# Altium PCB PCB1.PcbDoc
Units mil, origin at the board's own origin, x right, y up, seen from the top; angles counter-clockwise.
Board outline 910 x 1295 mil, 2 copper layers (Top Layer, Bottom Layer); 2 components, 0 nets, 64 pads, 52 vias.
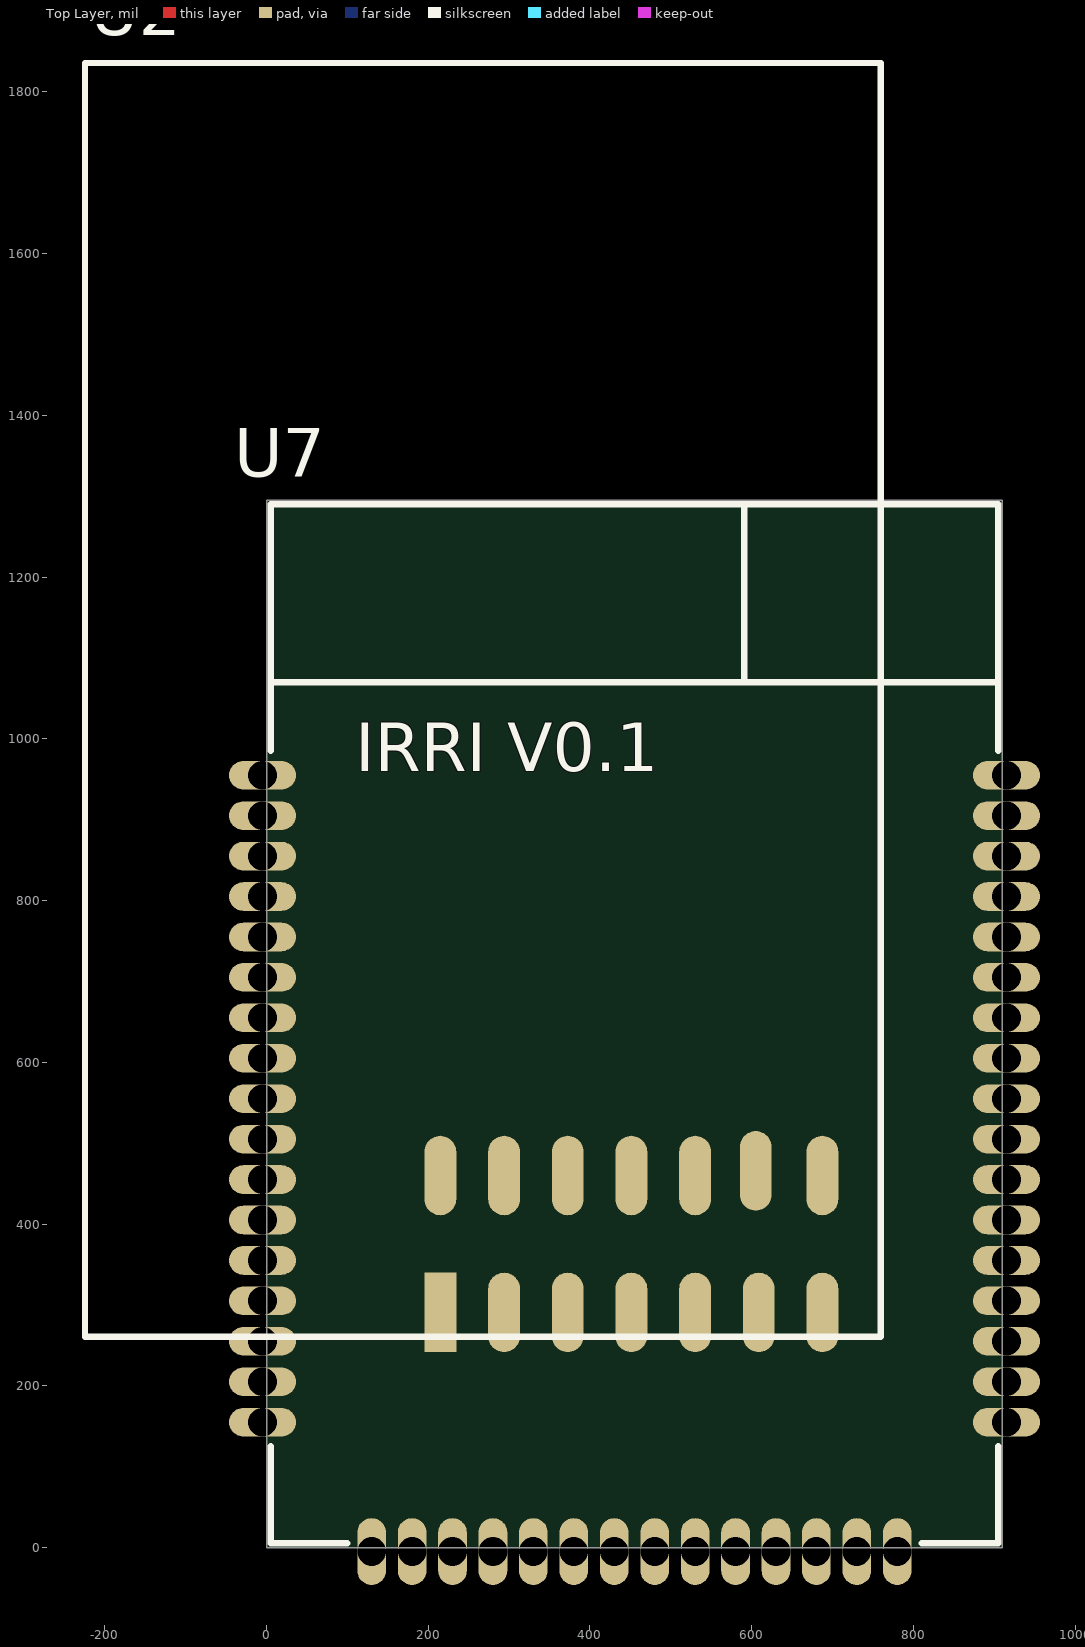
[diagram p0: Top Layer view]
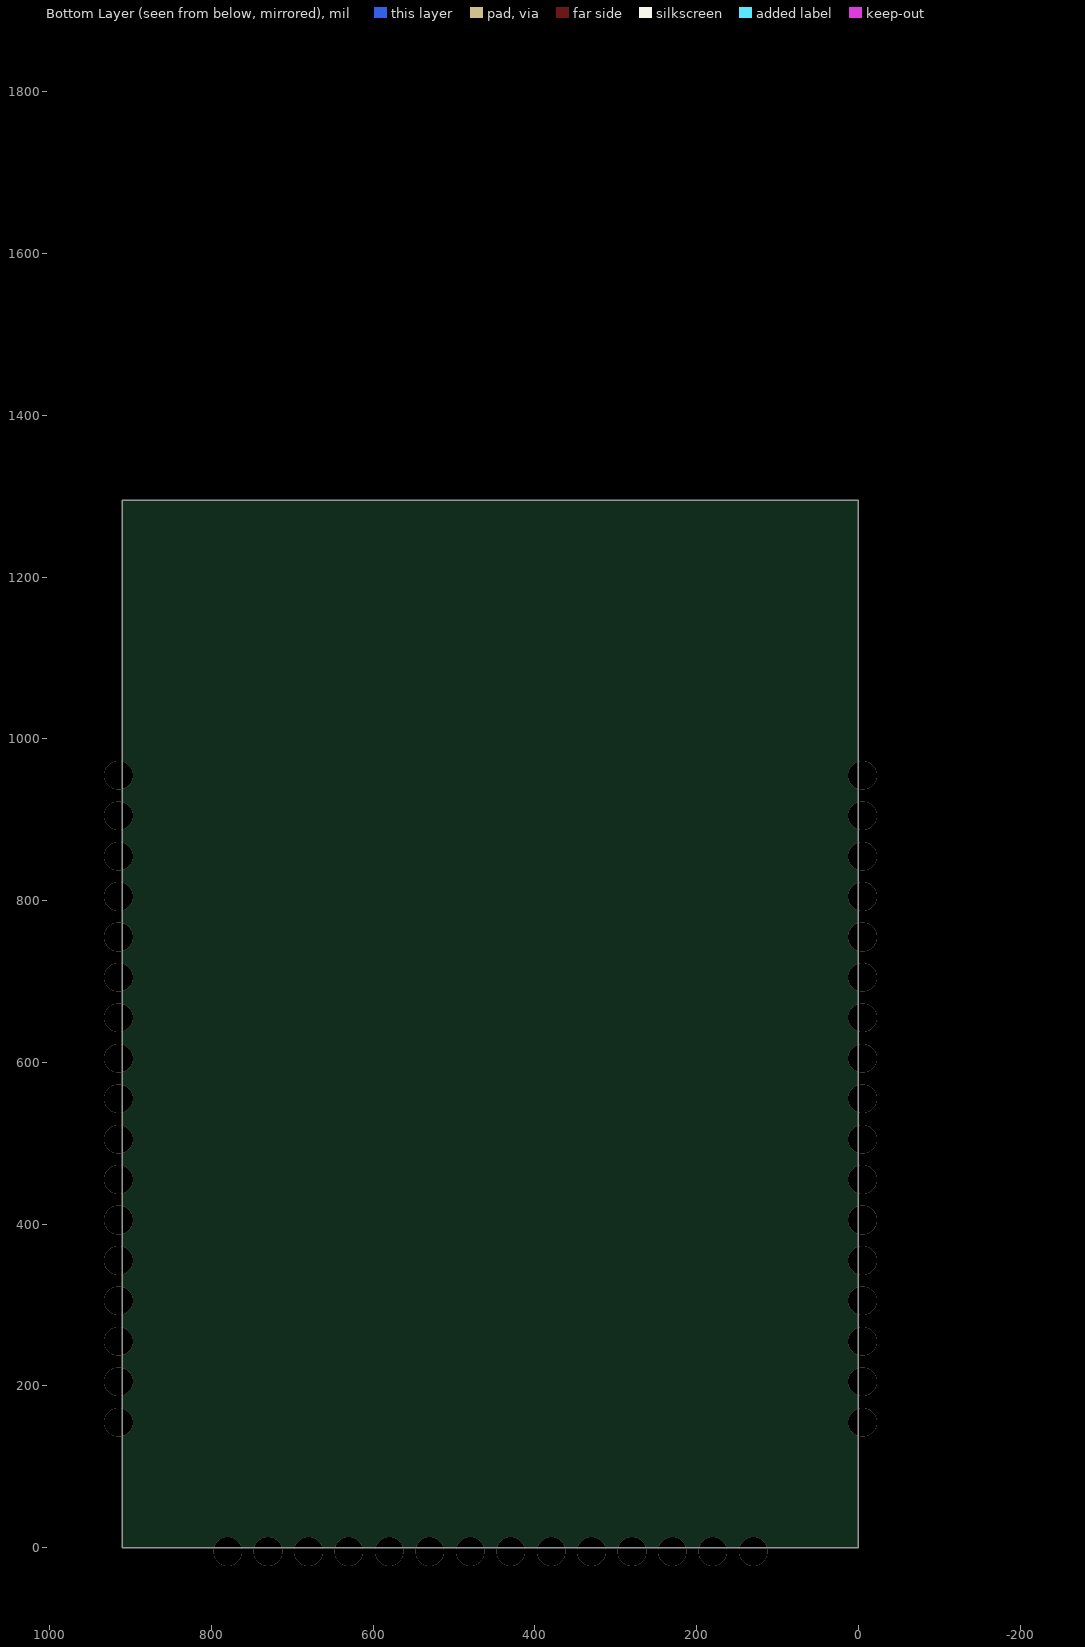
[diagram p1: Bottom Layer view, seen from below]

## Layer stack, top to bottom
Top Solder: solder mask 0.4, Solder Resist, Dk 3.5
Top Layer: signal copper 1.4
Dielectric 1: dielectric 12.6, FR-4, Dk 4.8
Bottom Layer: signal copper 1.4
Bottom Solder: solder mask 0.4, Solder Resist, Dk 3.5

## Board outline
0,0 0,1295 910,1295 910,0

## Design rules (kind name [scope] priority, off if disabled: settings)
Clearance [All] p1: gap=10 ignorepadtopadclearanceinfootprint=FALSE except(0: Arc-Hole Track-Hole SMDPad-Hole THPad-Hole Via-Hole Fill-Hole Poly-Hole Region-Hole Text-Hole)
PolygonConnect [All] p1: connectstyle=Relief reliefconductorwidth=10 reliefentries=4 polygonreliefangle="90 Angle" airgapwidth=10
RoomDefinition Sheet1 [InComponentClass('Sheet1')] p1: confinementstyle=ConfineIn formatcopy=TRUE lockcomponents=FALSE outline -3310,-2380 -1310,-2380 -1310,-1380 -3310,-1380
RoutingVias [All] p1: holewidth=28 width=50 viastyle="Through Hole" minholewidth=28 minwidth=50 maxholewidth=28 maxwidth=50
SolderMaskExpansion [All] p1: expansion=4 istentingtop=FALSE
Width [All] p1: maxlimit=10 minlimit=10 preferedwidth=10
30 further rules are at their usual default settings.

## Components (designator, comment, footprint, x,y, rotation, side; value= is the part's Value field where it differs from the comment)
U2 "USR-WIFI232-A/B/D" "USR-WIFI232-A/B/D SMT 2X7" 215,290.71 r90 top
U7 "WIFI232-G" "USR-WIFI232-G - castellated" -5,955 r0 top

## Footprints (in the part's own frame and the unit in brackets; to place one, negate y for a bottom-side part, rotate by r counter-clockwise, add the part's x,y. Pads: shape width x height; smd on the part's side, far side on the other; paste and mask are expansions set on the pad)
"USR-WIFI232-A/B/D SMT 2X7" [mm]
  round 0 hole 2.2: 0(36.743,-11.288) 0(36.743,8.612)
  rect 2.5x1 smd: 1(0,0)
  oval 2.5x1 smd: 2(0,-2) 3(0,-4) 4(0,-6) 5(0,-8) 6(0,-10) 7(0,-12) 8(4.3,-12) 9(4.445,-9.906) 10(4.3,-8) 11(4.3,-6) 12(4.3,-4) 13(4.3,-2) 14(4.3,0)
  silkscreen extent -0.76,-13.84 39.24,11.16, body extent -1.17,-12.97 5.49,1.03, height 4.6
"USR-WIFI232-G - castellated" [mm]
  oval 2.1x0.9 smd: 1(0,0) 2(0,-1.27) 3(0,-2.54) 4(0,-3.81) 5(0,-5.08) 6(0,-6.35) 7(0,-7.62) 8(0,-8.89) 9(0,-10.16) 10(0,-11.43) 11(0,-12.7) 12(0,-13.97) 13(0,-15.24) 14(0,-16.51) 15(0,-17.78) 16(0,-19.05) 17(0,-20.32) 32(23.368,-20.32) 33(23.368,-19.05) 34(23.368,-17.78) 35(23.368,-16.51) 36(23.368,-15.24) 37(23.368,-13.97) 38(23.368,-12.7) 39(23.368,-11.43) 40(23.368,-10.16) 41(23.368,-8.89) 42(23.368,-7.62) 43(23.368,-6.35) 44(23.368,-5.08) 45(23.368,-3.81) 46(23.368,-2.54) 47(23.368,-1.27) 48(23.368,0)
  oval 0.9x2.1 smd: 18(3.429,-24.384) 19(4.699,-24.384) 20(5.969,-24.384) 21(7.239,-24.384) 22(8.509,-24.384) 23(9.779,-24.384) 24(11.049,-24.384) 25(12.319,-24.384) 26(13.589,-24.384) 27(14.859,-24.384) 28(16.129,-24.384) 29(17.399,-24.384) 30(18.669,-24.384) 31(19.939,-24.384)
  silkscreen extent 0.25,-24.13 23.11,8.5

## Via types
v1: diameter 35.43, hole 35.43, Top Layer to Bottom Layer, 52 vias

## Nets (pads, with @x,y where several pads share a name; then routed paths per layer and width w, separated by ;. In a path a pad name is that pad's centre, name@x,y a point inside that pad or via, vN(x,y) a via of type N, cw(c..) or ccw(c..) an arc to the next point about the centre after c; other vN are vias at no path point)
pads on no net: U2.0 U2.1 U2.2 U2.3 U2.4 U2.5 U2.6 U2.7 U2.8 U2.9 U2.10 U2.11 U2.12 U2.13 U2.14 U7.1 U7.2 U7.3 U7.4 U7.5 U7.6 U7.7 U7.8 U7.9 U7.10 U7.11 U7.12 U7.13 U7.14 U7.15 U7.16 U7.17 U7.18 U7.19 U7.20 U7.21 U7.22 U7.23 U7.24 U7.25 U7.26 U7.27 U7.28 U7.29 U7.30 U7.31 U7.32 U7.33 U7.34 U7.35 U7.36 U7.37 U7.38 U7.39 U7.40 U7.41 U7.42 U7.43 U7.44 U7.45 U7.46 U7.47 U7.48
copper on no net:
  other v1: 130,-5 130,-5 180,-5 230,-5 280,-5 330,-5 380,-5 430,-5 480,-5 530,-5 580,-5 630,-5 680,-5 730,-5 780,-5 -5,155 915,155 -5,205 915,205 -5,255 915,255 -5,305 915,305 -5,355 915,355 -5,405 915,405 -5,455 915,455 -5,505 915,505 -5,555 915,555 -5,605 915,605 -5,655 915,655 -5,705 915,705 -5,755 915,755 -5,805 915,805 -5,855 915,855 -5,905 915,905 -5,955 -5,955 915,955 915,955 915,955

## Silkscreen, mask and mechanical layers (free items; w line width, h text height)
Top Overlay:
  text "IRRI V0.1" at 110,960 h60
Mechanical 1:
  the board outline again, w10